# Altium PCB FC.PcbDoc
Units mm, origin at the board's own origin, x right, y up, seen from the top; angles counter-clockwise.
Board outline 43.02 x 55.36 mm, 2 copper layers (Top Layer, Bottom Layer); 24 components, 30 nets, 144 pads, 17 vias.
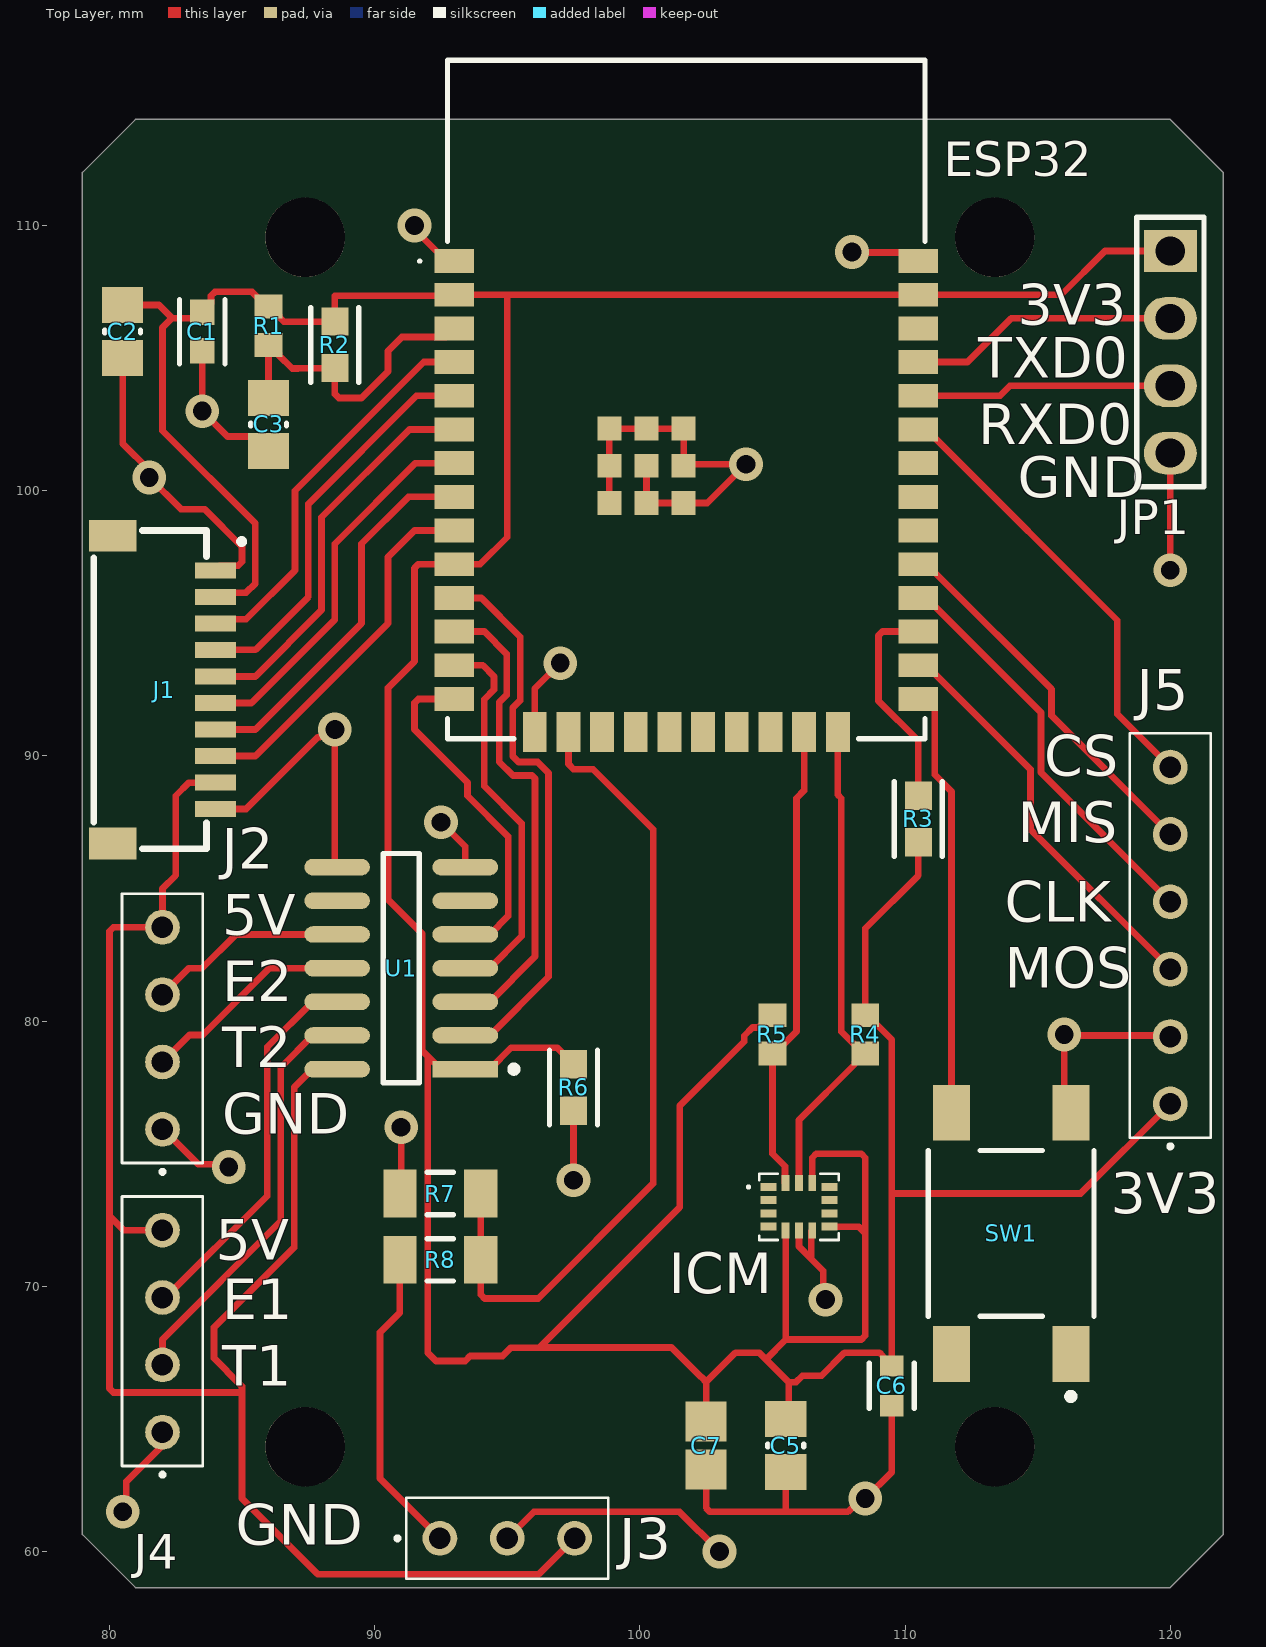
[diagram p0: Top Layer view]
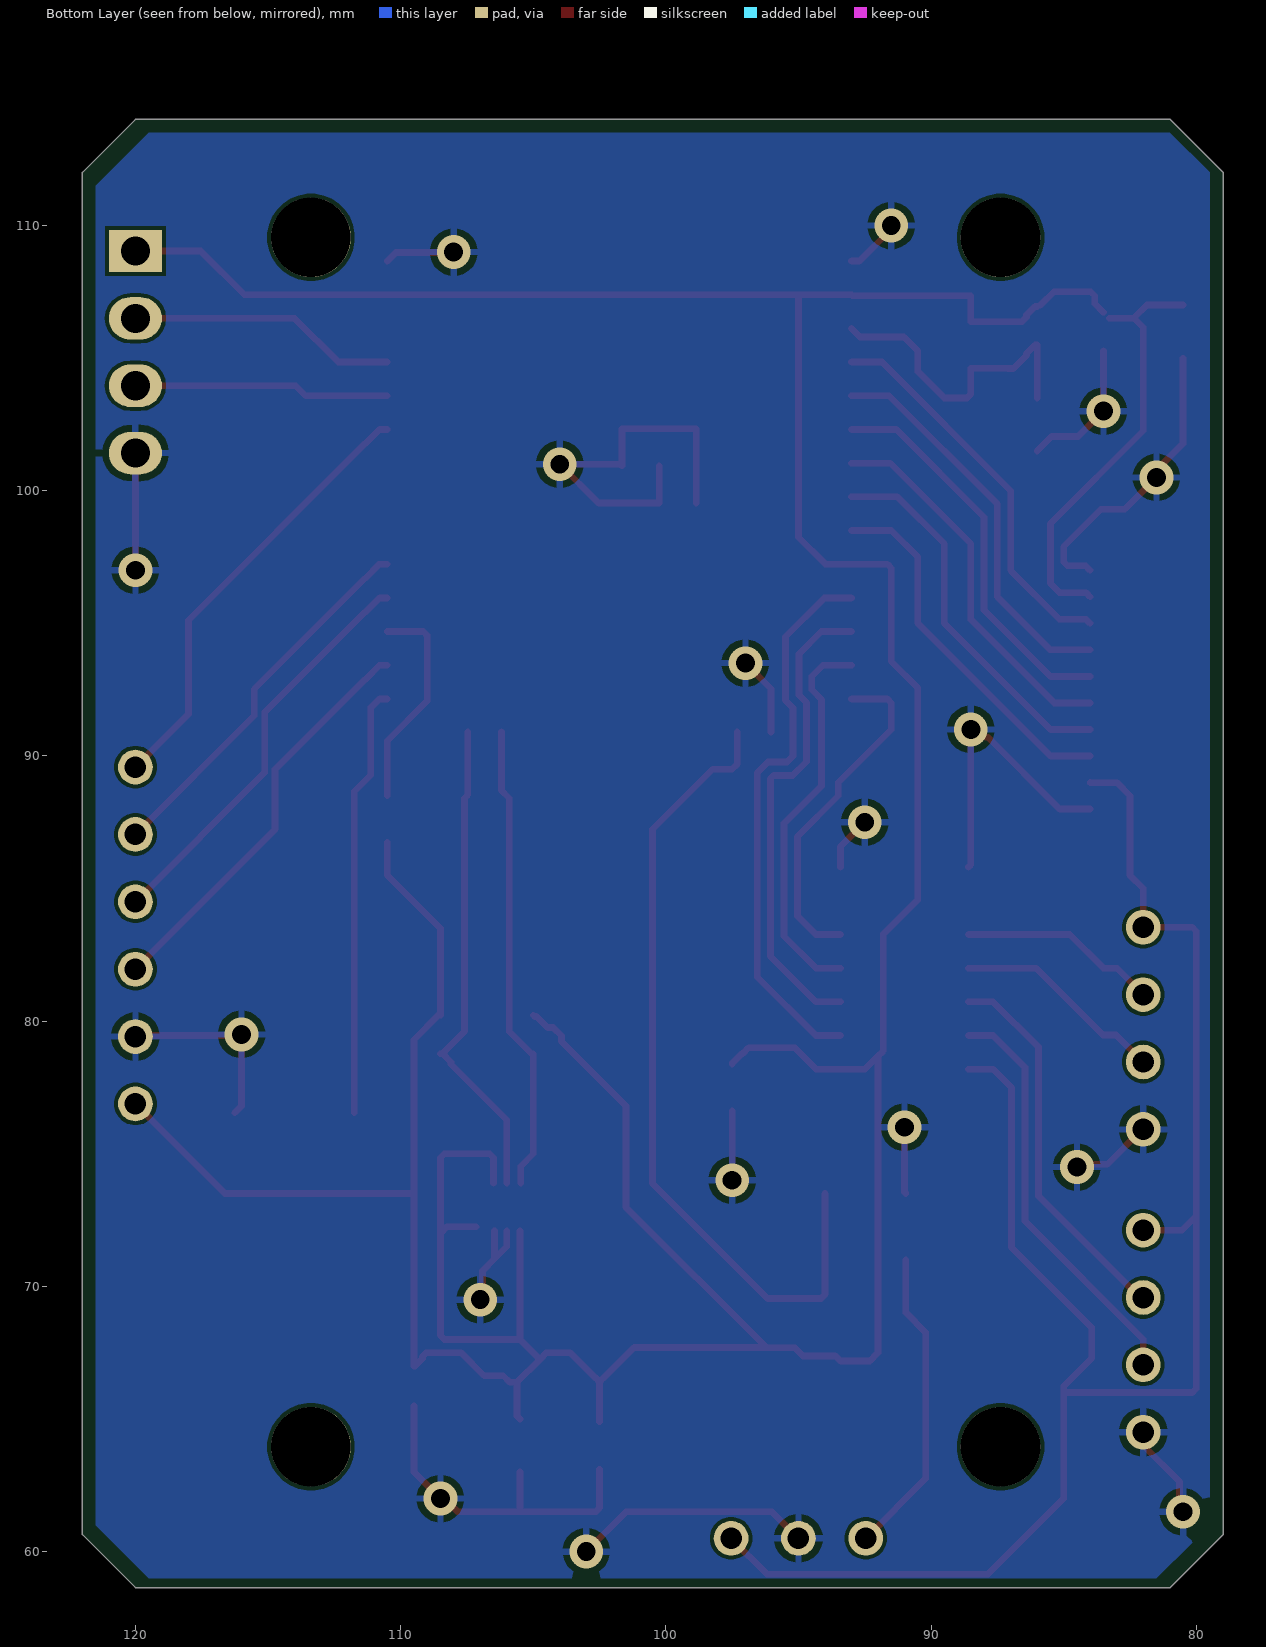
[diagram p1: Bottom Layer view, seen from below]
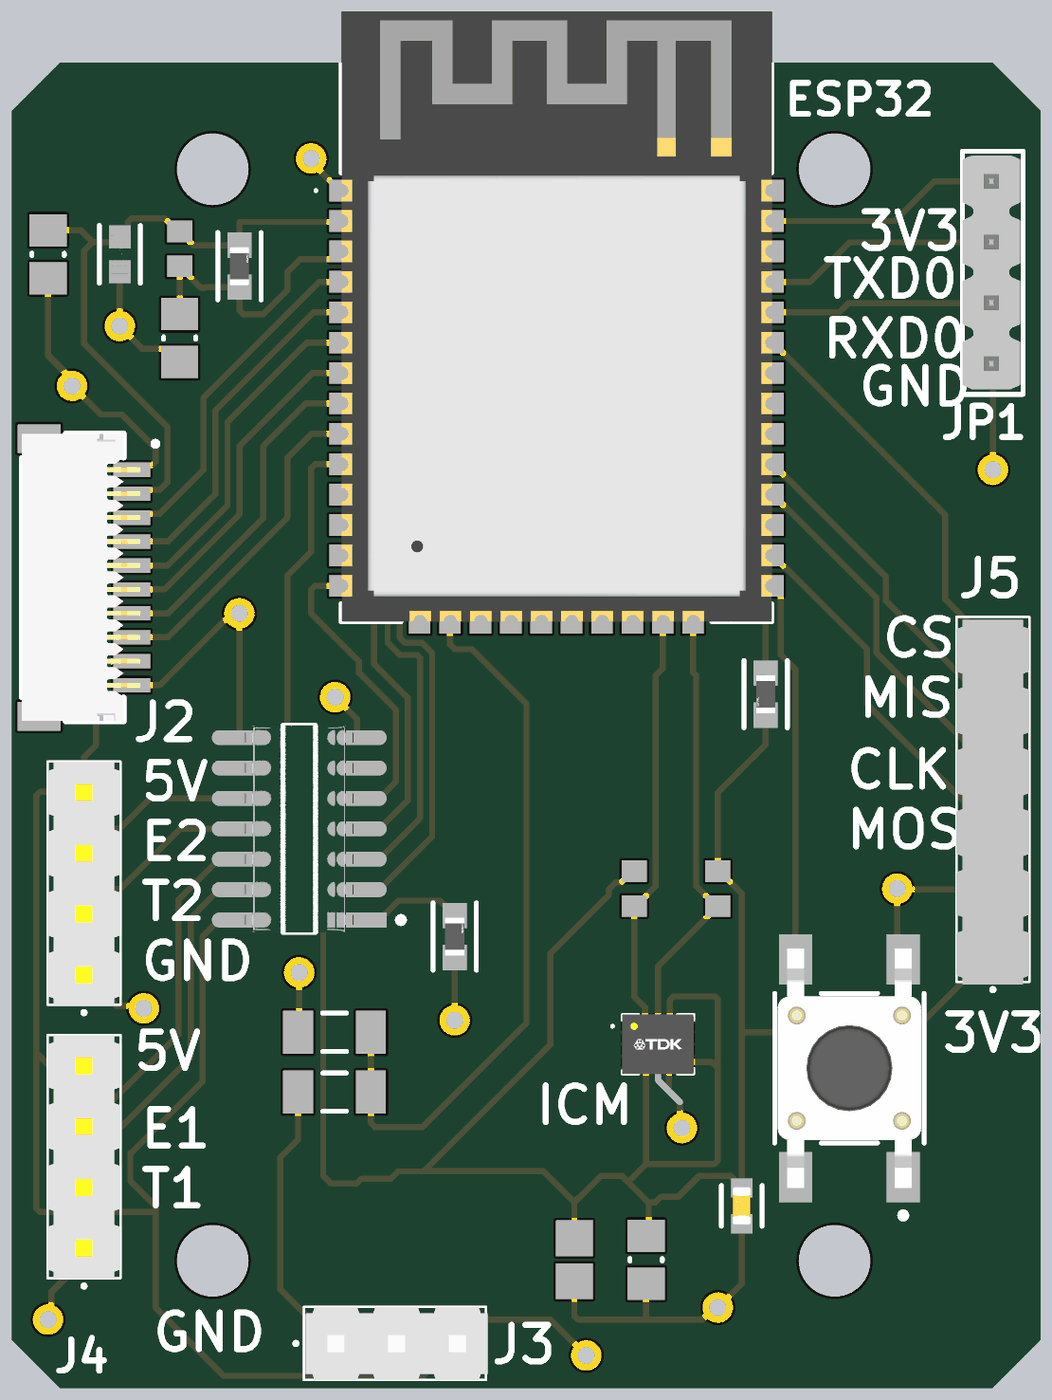
[diagram p2: 3D render of the assembled board from above, using the file's embedded part models]

## Layer stack, top to bottom
Top Solder: solder mask 0.0102, Solder Resist, Dk 3.5
Top Layer: signal copper 0.0356
Dielectric 1: dielectric 0.32, FR-4, Dk 4.8
Bottom Layer: signal copper 0.0356
Bottom Solder: solder mask 0.0102, Solder Resist, Dk 3.5

## Board outline
78.98,60.641 78.98,112 80.98,114 120,114 122,112 122,60.641 120,58.641 80.98,58.641

## Design rules (kind name [scope] priority, off if disabled: settings)
Clearance Clearance_2 [All] p1: gap=0.14 ignorepadtopadclearanceinfootprint=FALSE
Clearance Clearance_1 [All] p2: gap=0.254 ignorepadtopadclearanceinfootprint=FALSE
Clearance [All] p3: gap=0.254 ignorepadtopadclearanceinfootprint=FALSE except(0.3: Arc-Hole Track-Hole SMDPad-Hole THPad-Hole Via-Hole Fill-Hole Poly-Hole Region-Hole Text-Hole)
HoleSize [All] p1: absolutevalues=TRUE maxlimit=3 minlimit=0.025 maxpercent=80.000 minpercent=20.000
HoleSize HoleSize_1 [All] p2: absolutevalues=TRUE maxlimit=2.54 minlimit=0.025 maxpercent=80.000 minpercent=20.000
MinimumSolderMaskSliver MinimumSolderMaskSliver_2 [All] p1: minsoldermaskwidth=0.19
MinimumSolderMaskSliver MinimumSolderMaskSliver_1 [All] p2: minsoldermaskwidth=0.22
MinimumSolderMaskSliver [All] p3: minsoldermaskwidth=0.254
PolygonConnect [All] p1: connectstyle=Relief reliefconductorwidth=0.254 reliefentries=4 polygonreliefangle="90 Angle" airgapwidth=0.254
RoutingVias [All] p1: holewidth=0.711 width=1.27 viastyle="Through Hole" minholewidth=0.711 minwidth=1.27 maxholewidth=0.711 maxwidth=1.27
SilkToSilkClearance SilkToSilkClearance_1 [All] p1: silktosilkclearance=0.062
SilkToSilkClearance [All] p2: silktosilkclearance=0.254
SilkToSolderMaskClearance SilkToSolderMaskClearance_1 [All] p1: minsilkscreentomaskgap=0.062 clearancetoexposedcopper=TRUE
SilkToSolderMaskClearance [IsPad] p2: minsilkscreentomaskgap=0.254 clearancetoexposedcopper=TRUE
SolderMaskExpansion [All] p1: expansion=0.102 istentingtop=FALSE
SupplyNets "Schematic Supply Nets_3" [InNet('GND')] p1: voltage=0.000
SupplyNets "Schematic Supply Nets_1" [InNet('+3V3')] p2: voltage=0.000
Width [All] p1: maxlimit=0.254 minlimit=0.254 preferedwidth=0.254
26 further rules are at their usual default settings.

## Components (designator, comment, footprint, x,y, rotation, side; value= is the part's Value field where it differs from the comment)
C1 "22uF" FP-CL10-IPC_B 83.5,106 r270 top
C2 "0.1uF" CAPC0805(2012)145_M 80.5,106 r90 top value=100nF
C3 "0.1uF" CAPC0805(2012)145_M 86,102.5 r270 top value=100nF
C5 "0.1uF" CAPC0805(2012)145_M 105.5,64 r90 top value=100nF
C6 "2.2uF" FP-CC0603-DA-MFG 109.5,66.25 r270 top value="2.2 uF"
C7 "10uF" CAPC2013X140X50ML20T25 102.5,64 r90 top
ESP32 "ESP32-WROOM-32E-N8" ESP32WROOM32EN8 101.75,103.4 r0 top
ICM "ICM-42670-P" ICM42670P 106,73 r0 top
J1 "SM10B-SRSS-TB_LF__SN_" SM10B-SRSS-TB 83.658,98.5 r270 top
J2 "CES-104-02-S-S" CES-104-XX-Y-S 82,75.92 r90 top
J3 "CES-103-01-G-S" CES-103-XX-Y-S 92.46,60.5 r0 top
J4 "CES-104-02-S-S" CES-104-XX-Y-S 82,64.5 r90 top
J5 "CES-106-01-T-S" CES-106-XX-Y-S 120,76.88 r90 top
JP1 "UART" "HDR Male1~4 2.54mm" 120,109.04 r0 top
R1 "TBD 2.4k Ohm" RESC1608X55X30ML15T15 86,106.225 r90 top
R2 "0" FP-AC0603-IPC_A 88.5,105.5 r90 top
R3 "10k Ohm" FP-AC0603-IPC_A 110.5,87.623 r270 top
R4 "2.4k Ohm" RESC1608X55X30ML15T15 108.5,79.5 r90 top
R5 "2.4k Ohm" RESC1608X55X30ML15T15 105,79.5 r270 top
R6 "10k Ohm" FP-AC0603-IPC_A 97.5,77.5 r90 top
R7 "2k Ohm" RESC3116X65X40ML10T20 92.475,73.5 r0 top
R8 "1k Ohm" RESC3116X65X40ML10T20 92.475,71 r180 top
SW1 "" FP-TL3301AF160QG-MFG 114,72 r90 top
U1 "TXB0104D" FP-D0014A-IPC_A 91,82 r180 top

## Footprints (in the part's own frame and the unit in brackets; to place one, negate y for a bottom-side part, rotate by r counter-clockwise, add the part's x,y. Pads: shape width x height; smd on the part's side, far side on the other; paste and mask are expansions set on the pad)
CAPC0805(2012)145_M [mm] "Chip Capacitor, Body 2.0x1.2mm, Height 1.45mm, IPC Low Density"
  rect 1.35x1.55 smd: 1(-1,0) 2(1,0)
  silkscreen extent -0.05,-0.67 0.05,0.67, body extent -1.1,-0.72 1.1,0.72, height 1.45
CAPC2013X140X50ML20T25 [mm] "Chip Capacitor, 2-Leads, Body 2.00x1.25mm, IPC Low Density"
  rect 1.5x1.55 smd: 1(-0.9,0) 2(0.9,0)
  body extent -1.1,-0.72 1.1,0.72, height 1.4
CES-103-XX-Y-S [mm]
  round 1.31 hole 0.81: 1(0,0) 2(2.54,0) 3(5.08,0)
  silkscreen extent -1.65,-1.53 6.35,1.53, body extent -1.2,-1.53 6.42,1.51, height 5.04
CES-104-XX-Y-S [mm]
  round 1.31 hole 0.81: 1(0,0) 2(2.54,0) 3(5.08,0) 4(7.62,0)
  silkscreen extent -1.65,-1.53 8.89,1.53, body extent -1.29,-1.52 8.87,1.52, height 9.5
CES-106-XX-Y-S [mm]
  round 1.31 hole 0.81: 1(0,0) 2(2.54,0) 3(5.08,0) 4(7.62,0) 5(10.16,0) 6(12.7,0)
  silkscreen extent -1.65,-1.53 13.97,1.53, body extent -1.39,-1.52 13.85,1.52, height 7.27
ESP32WROOM32EN8 [mm]
  rect 1.5x0.9 smd: 1(-8.75,5.26) 2(-8.75,3.99) 3(-8.75,2.72) 4(-8.75,1.45) 5(-8.75,0.18) 6(-8.75,-1.09) 7(-8.75,-2.36) 8(-8.75,-3.63) 9(-8.75,-4.9) 10(-8.75,-6.17) 11(-8.75,-7.44) 12(-8.75,-8.71) 13(-8.75,-9.98) 14(-8.75,-11.25) 25(8.75,-11.25) 26(8.75,-9.98) 27(8.75,-8.71) 28(8.75,-7.44) 29(8.75,-6.17) 30(8.75,-4.9) 31(8.75,-3.63) 32(8.75,-2.36) 33(8.75,-1.09) 34(8.75,0.18) 35(8.75,1.45) 36(8.75,2.72) 37(8.75,3.99) 38(8.75,5.26)
  rect 0.9x1.5 smd: 15(-5.715,-12.5) 16(-4.445,-12.5) 17(-3.175,-12.5) 18(-1.905,-12.5) 19(-0.635,-12.5) 20(0.635,-12.5) 21(1.905,-12.5) 22(3.175,-12.5) 23(4.445,-12.5) 24(5.715,-12.5)
  rect 0.9x0.9 smd: 39(-2.9,-1.06) 40(-2.9,-2.46) 41(-2.9,-3.86) 42(-1.5,-3.86) 43(-0.1,-3.86) 44(-0.1,-2.46) 45(-0.1,-1.06) 46(-1.5,-1.06) 47(-1.5,-2.46)
  silkscreen extent -10.1,-12.75 9,12.83, body extent -8.98,-12.75 9.02,12.75, height 3.1
FP-AC0603-IPC_A [mm]
  rect 1.059x1.012 smd paste+0 mask+0: 1(-0.877,0) 2(0.877,0)
  silkscreen extent -1.41,-0.91 1.41,0.91, body extent -1.91,-1.01 1.91,1.01, height 0.25
FP-CC0603-DA-MFG [mm]
  rect 0.8x0.9 smd paste+0 mask+0: 1(-0.75,0) 2(0.75,0)
  silkscreen extent -0.85,-0.85 0.85,0.85, body extent -1.35,-0.75 1.35,0.75, height 0.25
FP-CL10-IPC_B [mm]
  rect 0.958x0.912 smd paste+0 mask+0: 1(-0.727,0) 2(0.727,0)
  silkscreen extent -1.21,-0.86 1.21,0.86, body extent -1.46,-0.71 1.46,0.71, height 0.25
FP-D0014A-IPC_A [mm]
  rect 2.474x0.622 smd paste+0 mask+0: 1(-2.416,3.81)
  rrect100% 2.474x0.622 smd paste+0 mask+0: 2(-2.416,2.54) 3(-2.416,1.27) 4(-2.416,0) 5(-2.416,-1.27) 6(-2.416,-2.54) 7(-2.416,-3.81) 8(2.416,-3.81) 9(2.416,-2.54) 10(2.416,-1.27) 11(2.416,0) 12(2.416,1.27) 13(2.416,2.54) 14(2.416,3.81)
  silkscreen extent -4.38,-4.33 0.68,4.33, body extent -4.15,-4.82 4.15,4.82, height 0.25
FP-TL3301AF160QG-MFG [mm]
  rect 2.1x1.4 smd paste+0 mask+0: 1(-4.55,-2.25) 2(4.55,-2.25) 3(-4.55,2.25) 4(4.55,2.25)
  silkscreen extent -6.27,-3.13 3.13,3.13, body extent -5.7,-3.22 5.7,3.22, height 0.25
"HDR Male1~4 2.54mm" [mm]
  rect 2x1.6 hole 1.1: 1(0,0)
  oval 2x1.6 hole 1.1: 2(0,-2.54) 3(0,-5.08) 4(0,-7.62)
  silkscreen extent -1.27,-8.89 1.27,1.27, body extent -1.27,-8.68 1.14,1.08, height 8.39
ICM42670P [mm]
  rect 0.6x0.3 smd: 1(-1.15,0.75) 2(-1.15,0.25) 3(-1.15,-0.25) 4(-1.15,-0.75) 8(1.15,-0.75) 9(1.15,-0.25) 10(1.15,0.25) 11(1.15,0.75)
  rect 0.3x0.6 smd: 5(-0.5,-0.9) 6(0,-0.9) 7(0.5,-0.9) 12(0.5,0.9) 13(0,0.9) 14(-0.5,0.9)
  silkscreen extent -1.95,-1.25 1.5,1.25, body extent -1.5,-1.25 1.5,1.25, height 0.65
RESC1608X55X30ML15T15 [mm] "Chip Resistor, 2-Leads, Body 1.60x0.80mm, IPC Low Density"
  rect 0.9x1.05 smd: 1(-0.725,0) 2(0.725,0)
  body extent -0.87,-0.48 0.87,0.48, height 0.55
RESC3116X65X40ML10T20 [mm] "Chip Resistor, 2-Leads, Body 3.10x1.60mm, IPC Low Density"
  rect 1.25x1.8 smd: 1(-1.525,0) 2(1.525,0)
  silkscreen extent -0.5,-0.8 0.5,0.8, body extent -1.6,-0.85 1.6,0.85, height 0.65
SM10B-SRSS-TB [mm]
  rect 0.6x1.55 smd: 1(1.5,0.342) 2(2.5,0.342) 3(3.5,0.342) 4(4.5,0.342) 5(5.5,0.342) 6(6.5,0.342) 7(7.5,0.342) 8(8.5,0.342) 9(9.5,0.342) 10(10.5,0.342)
  rect 1.2x1.8 smd: 11(0.2,-3.533) 12(11.8,-3.533)
  silkscreen extent 0,-4.25 12,1.41, body extent 0,-4.25 12,0.7, height 2.97

## Part data
C1: library part CMP-13271-002500-1, "Cap Ceramic 22uF 6.3V X5R ±20% Pad SMD 0603 +85°C T/R"
C2 C3 C5: library part CMP-1036-04429-1, "CAP 100nF 100V ±10% 0805 (2012 Metric) Thickness 1.45mm SMD", Case-EIA=0805, Case-Metric=2012, Rated Voltage="100 V", Tolerance=Â±10%, Max Thickness="1.45 mm", Technology=SMT
C6: library part CMP-03422-000187-1, "CC0603 2.2 uF X5R 10.00% 16 V", Capacitance="2.2 uF", Manufacturer=YAGEO, Manufacturer Part Number=CC0603KPX5R7BB225, Package=CC0603-DA, Temperature="-55°C to +125°C", Temperature Characteristic=X5R, Temperature Coefficient=15%, Temperature Range High=+125°C, Temperature Range Low=-55°C, Tolerance=0.1, Voltage="16 V", Automotive=No, Category=Cap, ComponentLink2Description=Datasheet, ComponentLink2URL=http://www.yageo.com/documents/recent/UPY-GPHC_X7R_6.3V-to-50V_18.pdf, Device Class L1="Passive Components", Device Class L2=Capacitors, Device Class L3="Ceramic Capacitors", Footprint Url=http://www.yageo.com/exep/pages/download/literatures/UPY-C_GEN_24.pdf, Height=0.9mm, Lead Free=Yes, Material=Ceramic, Octopart=https://octopart.com/cc0603kpx5r7bb225-yageo-91091799, RoHS=TRUE, Voltage Rating="16 V"
C7: library part CMP-2007-04644-1, Manufacturer="AVX Interconnect / Elco", Part Number=08056D106KAT4A
ESP32: "WiFi Modules - 802.11 SMD Module ESP32-WROOM-32E, ESP32-D0WD-V3, 8 MB SPI flash, PCB antenna", Manufacturer_Name="Espressif Systems", Mouser Part Number=356-ESP32WRM32E164PH, Datasheet Link=https://www.google.com/url?sa=t&rct=j&q=&esrc=s&source=web&cd=&ved=2ahUKEwjLw4ysybv2AhXFzIUKHZUbB64QFnoECCwQAQ&url=https%3A%2F%2Fwww.espressif.com%2Fsites%2Fdefault%2Ffiles%2Fdocumentation%2Fesp32-wroom-32e_esp32-wroom-32ue_datasheet_en.pdf&usg=AOvVaw1xSL, Geometry.Height=3.25mm, Manufacturer_Part_Number=ESP32-WROOM-32E-N8, Mouser Price/Stock=https://www.mouser.co.uk/ProductDetail/Espressif-Systems/ESP32-WROOM-32E-N8?qs=Li%252BoUPsLEnsLnZW%252BGLgUhw%3D%3D, Supplier 1=Mouser, Supplier Part Number 1=356-ESP32WRM32E164PH
ICM: "Integrated Circuit", Manufacturer_Name=TDK, Mouser Part Number=410-ICM-42670-P, Arrow Part Number=ICM-42670-P, Arrow Price/Stock=https://www.arrow.com/en/products/icm-42670-p/invensense?utm_currency=USD&region=nac, Datasheet Link=https://3cfeqx1hf82y3xcoull08ihx-wpengine.netdna-ssl.com/wp-content/uploads/2021/07/DS-000451-ICM-42670-P-v1.0.pdf, Manufacturer_Part_Number=ICM-42670-P, Mouser Price/Stock=https://www.mouser.co.uk/ProductDetail/TDK-InvenSense/ICM-42670-P?qs=iLbezkQI%252BsgK8sMF+5V7fQQ%3D%3D, Supplier 1=Mouser, Supplier Part Number 1=410-ICM-42670-P
J1: library part CMP-022-000000-1, "Connector", Arrow Part Number=SM10B-SRSS-TB(LF)(SN), Manufacturer_Name="JST (JAPAN SOLDERLESS TERMINALS)", Mouser Part Number=306-SM10BSRSSTBLFSN, Arrow Price/Stock=https://www.arrow.com/en/products/sm10b-srss-tb-lf-sn/jst-manufacturing?utm_currency=USD&region=europe, Datasheet Link=http://www.jst-mfg.com/product/pdf/eng/eSR.pdf, Design Item ID=SM10B-SRSS-TB_LF__SN_, Manufacturer_Part_Number=SM10B-SRSS-TB(LF)(SN), Mouser Price/Stock=https://www.mouser.co.uk/ProductDetail/JST-Commercial/SM10B-SRSS-TBLFSN?qs=QpmGXVUTftHkZAI%2F8hE40w%3D%3D, Source=SM10B-SRSS-TB_LF__SN.SchLib
J2 J4: "Connector", Manufacturer_Name=SAMTEC, Supplier Part Number 1=200-CES10402SS, Datasheet Link=http://suddendocs.samtec.com/prints/ces-1xx-xx-x-s-xx-mkt.pdf, Manufacturer_Part_Number=CES-104-02-S-S, Supplier 1=Mouser
J3: "Connector", Manufacturer_Name=SAMTEC, Supplier Part Number 1=200-CES10301GS, Datasheet Link=http://suddendocs.samtec.com/prints/ces-1xx-xx-x-s-xx-mkt.pdf, Manufacturer_Part_Number=CES-103-01-G-S, Supplier 1=Mouser
J5: "Connector", Manufacturer_Name=SAMTEC, Mouser Part Number=200-CES10601TS, Arrow Part Number=CES-106-01-T-S, Arrow Price/Stock=https://www.arrow.com/en/products/ces-106-01-t-s/samtec?region=nac, Datasheet Link=http://suddendocs.samtec.com/prints/ces-1xx-xx-x-s-xx-mkt.pdf, Manufacturer_Part_Number=CES-106-01-T-S, Mouser Price/Stock=https://www.mouser.co.uk/ProductDetail/Samtec/CES-106-01-T-S?qs=0lQeLiL1qybhMEQittjDMQ%3D%3D, Supplier 1=Mouser, Supplier Part Number 1=200-CES10601TS
JP1: library part CMP-022-000001-1, "CONN HEADER VERT 4POS 2.54MM", Color=Black, Current Rating=3A, Flammability Rating="UL94 V-0", Insulation Resistance=5GR, Manufacturer="Amphenol FCI", Manufacturer Part Number=68001-204HLF, Max Operating Temperature=125°C, Min Operating Temperature=-65°C, Package Quantity=100, Voltage Rating=1.5kV, Category="Headers and Wire Housings", ComponentLink1Description=https://datasheet.ciiva.com/5164/68000-274255-5164127.pdf?src-supplier=Mouser, ComponentLink1URL=https://datasheet.ciiva.com/5164/68000-274255-5164127.pdf?src-supplier=Mouser, ComponentLink2Description=https://datasheet.ciiva.com/726/68000-726529.pdf?src-supplier=Digi-Key, ComponentLink2URL=https://datasheet.ciiva.com/726/68000-726529.pdf?src-supplier=Digi-Key, Connector Type="Male Pin", Contact Gender=Male, Contact Material=Bronze, Contact Mating Length=0.23inch, Contact Plating=Gold,GXT, Contact Post Length=3.05mm, Design Item ID=68001-204HLF, Gender=Male, Housing Material=Thermoplastic, Mount="Through Hole", Number of Contacts=4, Number of Positions=4, Number of Rows=1, Orientation=Straight, Packaging=Bulk, Pitch=2.54mm, Pricing 1="1=0,38000, 10=0,35700, 100=0,25010, 500=0,21442, 1000=0,17868, 5000=0,15315, 10000=0,14294 (USD)", Radiation Hardening=No, RoHS=Yes, Source=68001-204HLF.Schlib, Stock 1=2857, Termination=Solder
R1 R4 R5: library part CMP-2000-00361-1, Manufacturer=Panasonic, Part Number=ERJ-3EKF2401V
R2 R3 R6: library part CMP-03412-040683-1, "RES 10kΩ 5.00% 0.2W 0603"
R7: library part CMP-2003-04932-1, Manufacturer=Yageo, Part Number=RC1206FR-102KL
R8: library part CMP-2003-04958-1, Manufacturer=Yageo, Part Number=RC1206JR-101KL
SW1: library part CMP-17879-000012-1, "SWITCH TACTILE SPST-NO 0.05A 12V", Contact Resistance=100mR, Current Rating=50mA, Insulation Resistance=100MR, Max Operating Temperature=70°C, Max Voltage Rating (DC)=50V, Min Operating Temperature=-20°C, Operating Force=160gf, Package Quantity=1000, Voltage Rating (DC)=12V, Actuator Length=1.4mm, Actuator Material=Nylon, Actuator Type=Standard, Contact Material=Silver, Contact Plating=Silver, Electrical Life=100000Cycles, Illumination Type=Non-Illuminated, Lead Free="Lead Free", Mechanical Life=100000Cycles, Mount="Surface Mount", Orientation=Straight, Packaging="Tape and Reel", REACH SVHC="No SVHC", RoHS Compliant=Yes, Series=TL3301, Switch Function=Off-Mom, Switch Travel=0.25mm, Termination="Gull Wing", Throw Configuration=SPST, Voltage Rating=50V
U1: library part CMP-04899-000034-1, "IC TRNSLTR BIDIRECTIONAL 14SOIC", Case/Package=SOIC, High Level Output Current=-20uA, Low Level Output Current=20uA, Max Operating Temperature=85°C, Max Supply Voltage=5.5V, Min Operating Temperature=-40°C, Min Supply Voltage=1.2V, Nominal Supply Current=5uA, Package Quantity=50, Quiescent Current=3.5uA, Data Rate=100Mbps, Height=1.58mm, Lead Free="Lead Free", Length=8.65mm, Logic Function=Translator, Mount="Surface Mount", Number of Bits=4, Number of Channels=4, Number of Circuits=1, Number of Inputs=4, Number of Pins=14, Output Current=20uA, Output Type=3-STATE, Packaging=Rail/Tube, Propagation Delay=4ns, Radiation Hardening=No, REACH SVHC="No SVHC", RoHS Compliant=Yes, Series=-, Turn-On Delay Time=7.4ns, Weight=0.004564oz, Width=3.91mm

## Free pads (board coordinates)
  round 3 hole 3 unplated: MH(87.381,63.953) MH(87.381,109.553) MH(113.381,63.953) MH(113.381,109.553)

## Via types
v1: diameter 1.27, hole 0.711, Top Layer to Bottom Layer, 17 vias

## Nets (pads, with @x,y where several pads share a name; then routed paths per layer and width w, separated by ;. In a path a pad name is that pad's centre, name@x,y a point inside that pad or via, vN(x,y) a via of type N, cw(c..) or ccw(c..) an arc to the next point about the centre after c; other vN are vias at no path point)
+3V3: C1.1 C2.2 C5.2 C6.1 C7.2 ESP32.2 ESP32.10 ESP32.37 ICM.5 ICM.8 ICM.12 J1.2 J5.1 JP1.1 R1.2 R2.2 R3.2 R4.2 R5.1 R6.2 U1.1 | length 197
  Top Layer w0.254: C2.2 81.864,107 82.356,106.509 ; C1.1@83.282,106.509 82.356,106.509 ; C1.1 83.829,107.056 83.829,107.351 83.978,107.5 85.375,107.5 R1.2@85.875,107 ; J1.2 84.156,96.156 85.156,96.156 85.5,96.5 85.5,98.76 82,102.26 82,106.153 82.356,106.509 ; R1.2 86.075,106.95 86.398,106.627 86.398,106.552 86.573,106.377 R2.2 88.5,107.351 92.961,107.351 ESP32.2 95,107.39 ; 96.215,67.695 101.194,67.695 102.313,66.576 102.324,66.576 102.5,66.4 ; R6.2 97.5,78.4 97.121,78.779 97.098,78.779 96.877,79 95.152,79 94.342,78.19 U1.1 92.49,78.19 92,78.68 ; C7.2 102.5,66.4 ; R5.1 104.95,80.175 104.875,80.175 104.465,79.765 104.251,79.765 103.935,79.449 103.935,79.235 101.5,76.8 101.5,72.98 96.21,67.69 95.144,67.69 94.828,67.374 93.6,67.374 93.416,67.19 92.31,67.19 92,67.5 92,78.68 ; C5.2 105.611,65.111 105.611,66.389 ; ICM.5 105.5,68 ; ICM.12 106.5,74.851 106.649,75 108.351,75 108.5,74.851 108.5,72 ; ICM.8 108.25,72.25 108.5,72 ; R4.2 108.5,83.5 110.5,85.5 R3.2 ; R4.2@108.575,80.225 109.5,79.3 109.5,73.5 ; J5.1 116.62,73.5 109.5,73.5 ; JP1.1 117.54,109.04 115.89,107.39 ESP32.37 95,107.39 ; 92,78.68 91.798,78.882 91.798,83.286 90.5,84.584 90.5,92.567 91.5,93.567 91.5,97.081 91.649,97.23 ESP32.10 93.982,97.23 95,98.248 95,107.39 ; 102.5,66.4 102.676,66.576 102.687,66.576 103.611,67.5 104.5,67.5 104.75,67.25 ; 104.75,67.25 105.5,68 ; 104.75,67.25 105.611,66.389 ; 105.5,68 108.351,68 108.5,68.149 108.5,72 ; 105.611,66.389 105.889,66.389 106.13,66.63 106.851,66.63 107.722,67.5 109.028,67.5 109.177,67.351 109.177,67.273 109.45,67 C6.1 109.5,73.5
+5V: J1.9 J2.4 J3.3 J4.4 U1.14 | length 66.8
  Top Layer w0.254: J4.4 80.529,72.12 80,72.649 ; J1.9 83.993,88.993 82.993,88.993 82.5,88.5 82.5,85.5 82,85 J2.4 80.149,83.54 80,83.391 80,72.649 ; 84.005,68.505 cw(c83.826,68.685) 83.939,68.458 83.939,67.294 84.926,66.307 85,66.232 85,66 ; 84.006,68.506 86.966,71.466 86.966,77.498 87.658,78.19 U1.14 ; J3.3 96.189,59.149 87.851,59.149 85,62 85,66 ; 80,72.649 80,66.149 80.149,66 85,66
CLK: ESP32.28 J5.4 | length 15.6
  Top Layer w0.254: ESP32.28 110.8,95.96 111.33,95.43 111.337,95.43 115.127,91.641 115.127,89.373 J5.4
CS: ESP32.33 J5.6 | length 16.8
  Top Layer w0.254: ESP32.33 110.8,102.31 111.33,101.78 111.337,101.78 118,95.118 118,91.58 J5.6
ECHO_I1: ESP32.12 U1.3 | length 18.2
  Top Layer w0.254: ESP32.12 94.139,94.69 94.979,93.85 94.979,92.301 94.696,92.018 94.696,89.782 95.217,89.261 95.935,89.261 96.05,89.146 96.05,82.438 94.342,80.73 U1.3
ECHO_I2: ESP32.14 U1.5 | length 13
  Top Layer w0.254: ESP32.14 91.649,92.15 91.5,92.001 91.5,91 93.5,89 93.5,88.5 95.034,86.966 95.034,83.962 94.342,83.27 U1.5
ECHO_O1: J4.3 U1.12 | length 14.5
  Top Layer w0.254: J4.3@82.06,69.52 85.95,73.41 85.95,79.022 87.658,80.73 U1.12
ECHO_O2: J2.3 U1.10 | length 7.5
  Top Layer w0.254: J2.3 83,82 83.5,82 84.77,83.27 U1.10
EN: C3.1 ESP32.3 R1.1 R2.1 | length 12
  Top Layer w0.254: C3.1 R1.1 86.075,105.5 86.398,105.177 86.398,105.102 86.895,104.605 87.105,104.605 87.123,104.623 R2.1 88.5,103.649 88.649,103.5 89.5,103.5 90.5,104.5 90.5,105.27 91.027,105.797 92.677,105.797 ESP32.3
ESC1: ESP32.6 J1.5 | length 14.9
  Top Layer w0.254: J1.5 85.5,93 88,95.5 88,99 91.31,102.31 ESP32.6
ESC2: ESP32.7 J1.6 | length 14.4
  Top Layer w0.254: J1.6 85.351,92 88.5,95.149 88.5,98 91.54,101.04 ESP32.7
ESC3: ESP32.8 J1.7 | length 14.4
  Top Layer w0.254: J1.7 85.5,91 89.5,95 89.5,98 91.27,99.77 ESP32.8
ESC4: ESP32.9 J1.8 | length 14
  Top Layer w0.254: J1.8 85.5,90 90.5,95 90.5,97.5 91.5,98.5 ESP32.9
ESC_TELE: ESP32.4 J1.3 | length 14.8
  Top Layer w0.254: J1.3 84.156,95.156 85.156,95.156 87,97 87,100 91.85,104.85 ESP32.4
GND: C1.2 C2.1 C3.2 C5.1 C6.2 C7.1 ESP32.1 ESP32.15 ESP32.38 ESP32.39 ESP32.40 ESP32.41 ESP32.42 ESP32.43 ESP32.44 ESP32.45 ESP32.46 ESP32.47 ICM.6 ICM.7 J1.1 J1.10 J2.1 J3.2 J4.1 J5.2 JP1.4 R6.1 R7.1 SW1.2 U1.7 U1.8 | length 102.1
  Top Layer w0.254: v1(80.5,61.5) 80.636,61.636 80.636,62.643 82,64.007 J4.1 ; C2.1 80.5,101.775 81.5,100.775 v1(81.5,100.5) 82.694,99.306 83.584,99.306 85,97.889 85,97.322 84.851,97.173 84.173,97.173 J1.1 ; J2.1 82.04,75.92 83.357,74.603 84.397,74.603 v1(84.5,74.5) ; C1.2 v1(83.5,103) 84.452,102.048 85.452,102.048 C3.2 ; J1.10 85.156,88 87.864,90.708 87.933,90.708 88.225,91 v1(88.5,91) 88.5,85.894 U1.8 ; R7.1 91,73.55 v1(91,76) ; v1(91.5,110) 91.5,109.86 92.7,108.66 ESP32.1 ; v1(92.5,87.5) 93.416,86.584 U1.7 ; J3.2 96,61.5 101.5,61.5 v1(103,60) ; ESP32.15 96.035,92.535 v1(97,93.5) ; v1(97.5,74) R6.1 ; ESP32.41 ESP32.40 ESP32.39 ESP32.46 ESP32.45 ESP32.44 101.71,101 v1(104,101) 102.54,99.54 ESP32.43 ESP32.42 ESP32.47 ; C7.1 102.5,61.649 102.649,61.5 105.5,61.5 ; C5.1 105.5,61.5 ; ICM.6 106,71.5 106.457,71.043 ; ICM.7@106.457,72.1 106.457,71.043 ; v1(107,69.5) 106.915,69.585 106.915,70.585 106.457,71.043 ; v1(108,109) 108.017,108.983 110.177,108.983 ESP32.38 ; C6.2 109.5,63 v1(108.5,62) 108.343,62 107.843,61.5 105.5,61.5 ; SW1.2 116,76.8 v1(116,79.5) 116.04,79.46 119.96,79.46 J5.2 ; v1(120,97) JP1.4
I_BATT: ESP32.5 J1.4 | length 15
  Top Layer w0.254: J1.4 85.5,94 87.5,96 87.5,99.5 91.58,103.58 ESP32.5
IO0: ESP32.25 SW1.4 | length 16.3
  Top Layer w0.254: ESP32.25 110.8,92.15 111.123,91.827 111.123,89.29 111.75,88.663 SW1.4
IO16: ESP32.27 R3.1 | length 8.2
  Top Layer w0.254: R3.1 110.5,90.572 109,92.072 109,94.541 109.149,94.69 ESP32.27
MIS: ESP32.29 J5.5 | length 14.3
  Top Layer w0.254: ESP32.29 110.8,97.23 111.33,96.7 111.337,96.7 115.521,92.517 115.521,91.519 J5.5
MOS: ESP32.26 J5.3 | length 15.6
  Top Layer w0.254: ESP32.26 110.8,93.42 111.33,92.89 111.337,92.89 114.733,89.495 114.733,87.227 J5.3
RXD0: ESP32.34 JP1.3 | length 9.7
  Top Layer w0.254: ESP32.34 113.58,103.58 113.96,103.96 JP1.3
SCL: ESP32.24 ICM.13 R4.1 | length 18.5
  Top Layer w0.254: ICM.13 106,74.389 106,76.275 108.102,78.377 108.102,78.452 R4.1@108.425,78.775 ; ESP32.24 107.465,88.535 107.594,88.406 107.594,79.606 R4.1@108.425,78.775 ; R4.1 R4.1@108.425,78.775
SDA: ESP32.23 ICM.14 R5.2 | length 17.7
  Top Layer w0.254: ICM.14@105.469,73.9 105.469,74.531 105,75 R5.2 105.075,78.775 105.906,79.606 105.906,88.406 106.195,88.695 ESP32.23
TRIG_I1: ESP32.11 U1.2 | length 21.1
  Top Layer w0.254: ESP32.11 94.023,95.96 95.487,94.496 95.487,92.091 95.204,91.808 95.204,89.992 95.427,89.769 96.146,89.769 96.558,89.357 96.558,81.676 94.342,79.46 U1.2
TRIG_I2: ESP32.13 U1.4 | length 14.8
  Top Layer w0.254: ESP32.13 94.08,93.42 94.5,93 94.5,92.5 94.131,92.131 94.131,88.869 95.542,87.458 95.542,83.2 94.342,82 U1.4
TRIG_O1: J4.2 U1.13 | length 15.7
  Top Layer w0.254: J4.2 82,68 86.458,72.458 86.458,78.26 87.658,79.46 U1.13
TRIG_O2: J2.2 U1.11 | length 8.1
  Top Layer w0.254: J2.2 83.02,79.48 83.52,79.48 86.04,82 U1.11
TXD0: ESP32.35 JP1.2 | length 10.2
  Top Layer w0.254: ESP32.35 112.35,104.85 114,106.5 JP1.2
VO_I1: ESP32.16 R7.2 R8.1 | length 30.9
  Top Layer w0.254: R7.2 R8.1 94,69.694 94.149,69.545 96.17,69.545 100.5,73.875 100.5,87.236 98.236,89.5 97.5,89.5 97.305,89.695 ESP32.16
VO_O1: J3.1 R8.2 | length 11.7
  Top Layer w0.254: R8.2 90.95,69.016 90.202,68.268 90.202,62.758 J3.1
pads on no net: ESP32.17 ESP32.18 ESP32.19 ESP32.20 ESP32.21 ESP32.22 ESP32.30 ESP32.31 ESP32.32 ESP32.36 ICM.1 ICM.2 ICM.3 ICM.4 ICM.9 ICM.10 ICM.11 J1.11 J1.12 SW1.1 SW1.3 U1.6 U1.9

## Polygon pours and split planes (outlines as drawn)
GND on Bottom Layer "GND_L02_P002" (solid, pour order 2): 79.5,112 81,113.5 119.5,113.5 121.5,111.5 121.5,61 119.5,59 81.5,59 79.5,61 79.5,112

## Silkscreen, mask and mechanical layers (free items; w line width, h text height)
Top Overlay:
  text "3V3" at 114.254,106.254 h1.52
  text "TXD0" at 112.754,104.254 h1.52
  text "RXD0" at 112.754,101.754 h1.52
  text "GND" at 114.254,99.754 h1.52
  text "CS" at 115.254,89.254 h1.52
  text "MIS" at 114.254,86.754 h1.52
  text "CLK" at 113.754,83.754 h1.52
  text "5V" at 84.254,83.254 h1.52
  text "MOS" at 113.754,81.254 h1.52
  text "E2" at 84.254,80.754 h1.52
  text "T2" at 84.254,78.254 h1.52
  text "GND" at 84.254,75.754 h1.52
  text "3V3" at 117.754,72.754 h1.52
  text "5V" at 84,71 h1.52
  text "E1" at 84.254,68.754 h1.52
  text "T1" at 84.254,66.254 h1.52
  text "GND" at 84.754,60.254 h1.52

## Text inside footprints (layer, text, board x,y; h text height)
JP1: Mechanical 2 "1" at 117.46,108.532 h1